# EAGLE board SHIELD 003 (EAGLE 9.4.1)

Size 109.2 x 171.12 mm. Coordinates in mm from the lower left corner, seen from the top.
Outline: 0,0 109.2,0 109.2,171.12 0,171.12 0,0
Copper layers (1*16): Top 0.035mm / dielectric 1.5mm / Bottom 0.035mm
Design rules "default": minimum track width 6mil, minimum drill 0.35mm, track to track 6mil, track to pad 6mil, pad to pad 6mil, via to via 6mil, smd to smd 6mil, copper to edge 40mil, drill to drill 6mil, minimum pad ring 10mil, minimum via ring 8mil, stop-mask expansion 4mil, vias tented up to drill 0mil, thermal gap 10mil

## Footprints (pad centres in the part's own frame; a part is rotated, then mirrored left to right if it is on the bottom)
ARDUINO_DUE_SHIELD = drill 1.067 square: 0 63.373,51.816; 5V0_1 93.853,51.816; 8 41.529,51.816; 21 86.233,51.816; 53 96.393,11.176; GND_2 93.853,8.636; MISO 63.373,31.496; MISO2 23.384,13.196 | drill 1.067: 1 60.833,51.816; 2 58.293,51.816; 3 55.753,51.816; 4 53.213,51.816; 5 50.673,51.816; 5V0_2 96.393,51.816; 5V_2 65.913,31.496; 6 48.133,51.816; 7 45.593,51.816; 9 38.989,51.816; 10 36.449,51.816; 11 33.909,51.816; 12 31.369,51.816; 13 28.829,51.816; 14 68.453,51.816; 15 70.993,51.816; 16 73.533,51.816; 17 76.073,51.816; 18 78.613,51.816; 19 81.153,51.816; 20 83.693,51.816; 22 93.853,49.276; 23 96.393,49.276; 24 93.853,46.736; 25 96.393,46.736; 26 93.853,44.196; 27 96.393,44.196; 28 93.853,41.656; 29 96.393,41.656; 30 93.853,39.116; 31 96.393,39.116; 32 93.853,36.576; 33 96.393,36.576; 34 93.853,34.036; 35 96.393,34.036; 36 93.853,31.496; 37 96.393,31.496; 38 93.853,28.956; 39 96.393,28.956; 40 93.853,26.416; 41 96.393,26.416; 42 93.853,23.876; 43 96.393,23.876; 44 93.853,21.336; 45 96.393,21.336; 46 93.853,18.796; 47 96.393,18.796; 48 93.853,16.256; 49 96.393,16.256; 50 93.853,13.716; 51 96.393,13.716; 52 93.853,11.176; AREF 23.749,51.816; GND_3 96.393,8.636; GND_4 26.289,51.816; GND_5 65.913,26.416; GND_7 33.161,44.473; JTAG_TCK 30.621,44.473; JTAG_TMS 28.081,44.473; MASTER_RESET_JTAG 25.541,44.473; MASTER_RESET_SPI 63.373,26.416; MOSI 65.913,28.956; SCL1 18.669,51.816; SDA1 21.209,51.816; SPCK 63.373,28.956 | drill 1.016 pad 1.88: 3V3 35.433,3.556; 5V0 37.973,3.556; A1 53.213,3.556; A2 55.753,3.556; A3 58.293,3.556; A4 60.833,3.556; A5 63.373,3.556; A6 65.913,3.556; A7 68.453,3.556; A9 76.073,3.556; A10 78.613,3.556; A11 81.153,3.556; CANRX 88.773,3.556; CANTX 91.313,3.556; DAC0 83.693,3.556; DAC1 86.233,3.556; GND 40.513,3.556; GND_1 43.053,3.556; IOREF 30.346,3.543; RESET 32.893,3.555; VIN 45.593,3.556 | drill 0.6 pad 1.016 square: 3V3_JTAG 23.689,36.964 | drill 1.067 octagon: 5V_ICSP1 25.924,13.196; GND_ICSP1 25.924,18.276; MOSI2 25.924,15.736; RESET2 23.384,18.276; SCK2 23.384,15.736 | drill 1.016 pad 1.88 square: A0 50.673,3.556; A8 73.533,3.556; NC_2 27.806,3.543 | drill 0.6 pad 1.143: GND_8 23.689,38.234; GND_9 23.689,40.774; GND_10 23.689,42.044; JTAG_RESET 22.419,42.044; JTAG_TCK_2 22.419,38.234; JTAG_TDI 22.419,40.774; JTAG_TDO 22.419,39.504; JTAG_TMS_2 22.419,36.964; NC_5 23.689,39.504 | hole 3.2: 15.113,51.816; 90.043,51.816; 96.393,3.556; 96.418,3.505; 15.138,51.765; 90.068,51.765; 13.868,3.505; 65.938,36.525; 65.938,8.585
C050-025X075 = drill 0.813 octagon: 1 -2.54,0; 2 2.54,0
E2-4 = drill 0.813 pad 1.422: + -1.016,0 | drill 0.813 pad 1.422 octagon: - 1.016,0
DCJACK_2MM_PTH = drill 2.8: GND 0,7.35; GNDBREAK 4.8,10.75 | drill 3.2: PWR 0,13.6
IC_DRV8825_STEPPER_MOTOR_DRIVER_CARRIER = drill 1.1 square: 1 -6.35,8.89 | drill 1.1: 2 -6.35,6.35; 3 -6.35,3.81; 4 -6.35,1.27; 5 -6.35,-1.27; 6 -6.35,-3.81; 7 -6.35,-6.35; 8 -6.35,-8.89; 9 6.35,-8.89; 10 6.35,-6.35; 11 6.35,-3.81; 12 6.35,-1.27; 13 6.35,1.27; 14 6.35,3.81; 15 6.35,6.35; 16 6.35,8.89
EVE-WRHJR012B = drill 1: A 2.55,-7.5; B 0,-7.5; B1 -2.5,-7.5; COM -2.5,7; S 2.5,7 | drill 1.8 square: M1 -5.5,0; M2 5.5,0
TO220H = drill 1.118 long: 1 -2.54,-10.16; 2 0,-10.16; 3 2.54,-10.16 | hole 3.302: 0,4.826
ARDUINO-NANO-3.0 = drill 1 square: J1.1 17.78,7.62 | drill 1: J1.2 15.24,7.62; J1.3 12.7,7.62; J1.4 10.16,7.62; J1.5 7.62,7.62; J1.6 5.08,7.62; J1.7 2.54,7.62; J1.8 0,7.62; J1.9 -2.54,7.62; J1.10 -5.08,7.62; J1.11 -7.62,7.62; J1.12 -10.16,7.62; J1.13 -12.7,7.62; J1.14 -15.24,7.62; J1.15 -17.78,7.62; J2.1 17.78,-7.62; J2.2 15.24,-7.62; J2.3 12.7,-7.62; J2.4 10.16,-7.62; J2.5 7.62,-7.62; J2.6 5.08,-7.62; J2.7 2.54,-7.62; J2.8 0,-7.62; J2.9 -2.54,-7.62; J2.10 -5.08,-7.62; J2.11 -7.62,-7.62; J2.12 -10.16,-7.62; J2.13 -12.7,-7.62; J2.14 -15.24,-7.62; J2.15 -17.78,-7.62 | hole 1.651: -20.32,7.62; -20.32,-7.62; 20.32,-7.62; 20.32,7.62
DIL04 = drill 0.813 offset: 1 -1.27,-3.81; 2 1.27,-3.81; 3 1.27,3.81; 4 -1.27,3.81
0207/10 = drill 0.813 octagon: 1 -5.08,0; 2 5.08,0
L02P = drill 1.016 long: 1 1.25,-6.25; 2 -1.25,-6.25
TO92-EBC-OVAL = drill 0.813 long: B 0,-1.27; C 2.54,-1.27; E -2.54,-1.27
3.5INCH = drill 1.1: 3-5V 21.59,-40.64; 3V3 19.05,-40.64; CARD-CS -21.59,-40.64; CARD-DET -24.13,-40.64; CLK 16.51,-40.64; CS 8.89,-40.64; D/C 6.35,-40.64; GND3 -11.43,-40.64; IM0 -19.05,-40.64; IM1 -16.51,-40.64; IM2 -13.97,-40.64; LIGHT 1.27,-40.64; MISO 13.97,-40.64; MOSI 11.43,-40.64; RST 3.81,-40.64; X+ -3.81,-40.64; X- -8.89,-40.64; Y+ -1.27,-40.64; Y- -6.35,-40.64 | drill 1.1 square: GND 24.13,-40.64 | hole 4: -30.48,50.8; 30.48,50.8; -30.48,-40.64; 30.48,-40.64
DC-DC-STEP-DOWN-LM2596 = drill 1.5 pad 2.5 square: IN+ -19.812,8.636; IN- -19.812,-8.636; OUT+ 19.812,8.636; OUT- 19.812,-8.636 | hole 3: -14.478,7.62; 15.24,-7.62
DFPLAYER-MINI-MODULE = drill 1 square: 1 -8.89,-8.89 | drill 1: 2 -6.35,-8.89; 3 -3.81,-8.89; 4 -1.27,-8.89; 5 1.27,-8.89; 6 3.81,-8.89; 7 6.35,-8.89; 8 8.89,-8.89; 9 8.89,8.89; 10 6.35,8.89; 11 3.81,8.89; 12 1.27,8.89; 13 -1.27,8.89; 14 -3.81,8.89; 15 -6.35,8.89; 16 -8.89,8.89
GPS-RECEIVER-NEO6M = drill 1 square: 1 -15.875,5.08 | drill 1: 2 -15.875,2.54; 3 -15.875,0; 4 -15.875,-2.54; 5 -15.875,-5.08 | hole 3: -14.986,9.017; -14.986,-9.017; 14.986,-9.017; 14.986,9.017 | hole 3.5: 14.351,-2.54
JOYSTICK-2AXIS-BUTTON = drill 1 square: 1 -15.24,5.08 | drill 1: 2 -15.24,2.54; 3 -15.24,0; 4 -15.24,-2.54; 5 -15.24,-5.08 | hole 3: -12.065,10.16; -12.065,-10.16; 13.97,-10.16; 13.97,10.16
RTC-DS3231-AT24C32 = drill 1 square: J1.1 -17.78,6.35; J2.1 17.78,3.81 | drill 1: J1.2 -17.78,3.81; J1.3 -17.78,1.27; J1.4 -17.78,-1.27; J1.5 -17.78,-3.81; J1.6 -17.78,-6.35; J2.2 17.78,1.27; J2.3 17.78,-1.27; J2.4 17.78,-3.81 | hole 2.2: -11.43,-9.525; -11.43,9.525; 15.24,9.525
TEMP-HUM-SENSOR-DHT22 = drill 0.8 square: 1 -3.81,0 | drill 0.8: 2 -1.27,0; 3 1.27,0; 4 3.81,0
WIRELESS-BLUETOOTH-HC-05 = drill 1 square: 1 -6.35,-17.145 | drill 1: 2 -3.81,-17.145; 3 -1.27,-17.145; 4 1.27,-17.145; 5 3.81,-17.145; 6 6.35,-17.145
CARD-SD-ADAPTER = drill 1 square: 1 -21.59,8.89 | drill 1: 2 -19.05,8.89; 3 -21.59,6.35; 4 -19.05,6.35; 5 -21.59,3.81; 6 -19.05,3.81; 7 -21.59,1.27; 8 -19.05,1.27; 9 -21.59,-1.27; 10 -19.05,-1.27; 11 -21.59,-3.81; 12 -19.05,-3.81; 13 -21.59,-6.35; 14 -19.05,-6.35; 15 -21.59,-8.89; 16 -19.05,-8.89 | hole 2.5: -20.32,12.5; -20.32,-12.5

## Placement (x,y rotation side)
ARDUINO_DUE1  [ARDUINO_DUE_SHIELD]  25.4,67.31 90 bottom
C1  10uF  [C050-025X075]  92.71,27.94 0 top
C2  100nF  [C050-025X075]  12.7,66.04 0 top
C3  [C050-025X075]  12.7,80.01 180 top
C4  [C050-025X075]  12.7,91.44 180 top
C5  100uF  [E2-4]  99.06,116.84 180 top
C6  100uF  [E2-4]  99.06,76.2 180 top
C7  100uF  [E2-4]  99.06,96.52 180 top
CN1  [DCJACK_2MM_PTH]  100.33,-1.27 0 top
DEC  DRV8825_STEPPER_MOTOR_DRIVER_CARRIER  [IC_DRV8825_STEPPER_MOTOR_DRIVER_CARRIER]  92.71,106.68 270 top
EN1  EVE-WRHJR012B  [EVE-WRHJR012B]  29.21,16.51 0 top
FOCUS  DRV8825_STEPPER_MOTOR_DRIVER_CARRIER  [IC_DRV8825_STEPPER_MOTOR_DRIVER_CARRIER]  92.71,86.36 270 top
IC1  7805T  [TO220H]  90.17,55.88 90 top
M1  ARDUINO-NANO-3.0  [ARDUINO-NANO-3.0]  53.34,21.59 90 bottom
OK1  PC817  [DIL04]  25.4,29.21 270 top
OK2  PC817  [DIL04]  25.4,35.56 270 top
OK3  PC817  [DIL04]  25.4,41.91 270 top
OK4  PC817  [DIL04]  25.4,48.26 270 top
OK5  PC817  [DIL04]  25.4,54.61 270 top
R1  220  [0207/10]  12.7,62.23 180 top
R2  6.8  [0207/10]  12.7,59.69 0 top
R3  10K  [0207/10]  12.7,102.87 0 top
R4  330  [0207/10]  12.7,77.47 180 top
R5  330  [0207/10]  12.7,87.63 180 top
R6  100  [0207/10]  11.43,38.1 0 top
R7  100  [0207/10]  11.43,43.18 0 top
R8  100  [0207/10]  11.43,40.64 0 top
R9  100  [0207/10]  11.43,45.72 0 top
R10  100  [0207/10]  11.43,48.26 180 bottom
R11  100k  [0207/10]  73.66,21.59 90 top
R12  47k  [0207/10]  76.2,21.59 270 top
R13  100k  [0207/10]  78.74,21.59 90 top
R14  47k  [0207/10]  81.28,21.59 270 top
R15  10k  [0207/10]  38.1,130.81 90 top
R16  26k  [0207/10]  40.64,130.81 270 top
R17  47k  [0207/10]  86.36,21.59 270 top
R18  100k  [0207/10]  83.82,21.59 90 top
R19  100  [0207/10]  38.1,30.48 180 top
R20  100  [0207/10]  38.1,33.02 0 top
R21  100  [0207/10]  38.1,35.56 180 top
R22  100  [0207/10]  38.1,40.64 180 top
R23  100  [0207/10]  38.1,38.1 180 top
RA  DRV8825_STEPPER_MOTOR_DRIVER_CARRIER  [IC_DRV8825_STEPPER_MOTOR_DRIVER_CARRIER]  92.71,127 270 top
SV1  [L02P]  0,69.85 90 top
SV2  [L02P]  0,83.82 90 top
SV3  [L02P]  0,55.88 90 top
SV4  [L02P]  72.39,104.14 0 top
T1  2N2222  [TO92-EBC-OVAL]  12.7,72.39 180 top
T2  2N2222  [TO92-EBC-OVAL]  12.7,97.79 0 top
T3  2N2222  [TO92-EBC-OVAL]  12.7,50.8 180 top
U1  3.5INCH  [3.5INCH]  53.34,116.84 0 top
U$1  DC-DC-STEP-DOWN-LM2596  [DC-DC-STEP-DOWN-LM2596]  97.79,50.8 90 bottom
U$2  DFPLAYER-MINI-MODULE  [DFPLAYER-MINI-MODULE]  53.34,105.41 90 top
U$3  GPS-RECEIVER-NEO6M  [GPS-RECEIVER-NEO6M]  92.84,152.65 90 top
U$4  JOYSTICK-2AXIS-BUTTON  [JOYSTICK-2AXIS-BUTTON]  78.74,22.86 90 top
U$5  RTC-DS3231-AT24C32  [RTC-DS3231-AT24C32]  15.24,128.27 90 top
U$6  TEMP-HUM-SENSOR-DHT22  [TEMP-HUM-SENSOR-DHT22]  2.54,99.06 270 top
U$7  WIRELESS-BLUETOOTH-HC-05  [WIRELESS-BLUETOOTH-HC-05]  21.59,156.21 270 top
U$8  CARD-SD-ADAPTER  [CARD-SD-ADAPTER]  82.55,58.42 180 bottom

## Library data of the parts
ARDUINO_DUE1 = arduino_due_shield
C1-C4 CN1 T1-T3 = adafruit
C5-C7 = BeagleBone_Blue_R3
DEC FOCUS RA = DRV8825_STEPPER_MOTOR_DRIVER_CARRIER; AVAILABILITY: Unavailable; DESCRIPTION: Stepper, Bipolar 8.2 ~ 45VDC Supply 1.5A 8.2 ~ 45V Load; MF: Pololu; MP: DRV8825 STEPPER MOTOR DRIVER CARRIER; PACKAGE: None; PRICE: None
EN1 = Encoders; CREATED_BY: PCBLayout.com; DIGIKEY_PARTNO: P15917-ND; MANUFACTURER: Panasonic Electronic Components; MPN: EVE-WRHJR012B
IC1 = linear
M1 U$1-U$8 = diy-modules
OK1-OK5 = optocoupler-3-jcn
R1-R23 = eagle-ltspice; SPICEMODEL: NONE; SPICEPREFIX: R
SV1-SV4 = con-amp-mt; OC_FARNELL: unknown; OC_NEWARK: unknown
U1 = 3.5inch display adafruit-NO8BIT; AVAILABILITY: Unavailable; DESCRIPTION: Stepper, Bipolar 8.2 ~ 45VDC Supply 1.5A 8.2 ~ 45V Load; MF: Pololu; MP: DRV8825 STEPPER MOTOR DRIVER CARRIER; PACKAGE: None; PRICE: None

## Nets
3-5V: U1.3-5V
3V3: ARDUINO_DUE1.3V3 DEC.5 DEC.6 DEC.10 FOCUS.5 FOCUS.6 FOCUS.10 M1.J2.14 OK1.3 OK2.3 OK3.3 OK4.3 OK5.3 R3.1 RA.5 RA.6 RA.10 U$6.1 U$8.3
5V: R2.2 SV1.2 SV2.2 U$1.OUT+ U$2.1 U$5.J1.5 U$7.5 U$8.5
5V_A: ARDUINO_DUE1.5V0 ARDUINO_DUE1.5V0_1 ARDUINO_DUE1.5V0_2 M1.J2.4 U$3.1 U$4.2
9V: ARDUINO_DUE1.VIN C2.1 IC1.3 M1.J2.1
12V: C1.1 C5.+ C6.+ C7.+ CN1.PWR DEC.16 FOCUS.16 IC1.1 R16.2 RA.16 U$1.IN+
DAC1: ARDUINO_DUE1.DAC1 R1.1
DEC+: M1.J1.9 R8.1
DEC-: M1.J1.6 R9.1
DEC-A1: DEC.12
DEC-A2: DEC.11
DEC-B1: DEC.13
DEC-B2: DEC.14
DEC_M0: ARDUINO_DUE1.10 DEC.2
DEC_M1: ARDUINO_DUE1.9 DEC.3
DEC_M2: ARDUINO_DUE1.8 DEC.4
FOCUS-A1: FOCUS.12
FOCUS-A2: FOCUS.11
FOCUS-B1: FOCUS.13
FOCUS-B2: FOCUS.14
FOCUS_M0: FOCUS.2
FOCUS_M1: FOCUS.3
FOCUS_M2: FOCUS.4
G-SENSE: M1.J1.10 R10.1
GND: ARDUINO_DUE1.GND ARDUINO_DUE1.GND_1 ARDUINO_DUE1.GND_2 ARDUINO_DUE1.GND_3 ARDUINO_DUE1.GND_4 ARDUINO_DUE1.GND_5 ARDUINO_DUE1.GND_7 ARDUINO_DUE1.GND_8 ARDUINO_DUE1.GND_9 ARDUINO_DUE1.GND_10 C1.2 C2.2 C3.2 C4.2 C5.- C6.- C7.- CN1.GND DEC.9 DEC.15 FOCUS.9 FOCUS.15 IC1.2 M1.J1.4 M1.J2.2 OK1.2 OK2.2 OK3.2 OK4.2 OK5.2 R11.1 R13.1 R15.1 R18.1 RA.9 RA.15 T1.E T2.E T3.E U1.GND U$1.IN- U$1.OUT- U$2.7 U$2.10 U$3.2 U$4.1 U$5.J1.6 U$5.J2.4 U$6.4 U$7.4 U$8.1 U$8.15
GND2: U1.GND3
GNDBREAK: CN1.GNDBREAK
N$1: R1.2 T3.B
N$2: R2.1 SV3.1
N$3: SV1.1 T1.C
N$4: R4.2 T1.B
N$5: SV3.2 T3.C
N$6: R5.2 T2.B
N$7: SV2.1 T2.C
N$9: R17.2 U$4.5
N$19: ARDUINO_DUE1.A11
N$21: ARDUINO_DUE1.2
N$22: ARDUINO_DUE1.CANRX
N$23: ARDUINO_DUE1.CANTX
N$24: ARDUINO_DUE1.1
N$25: ARDUINO_DUE1.0
N$30: OK5.4 R23.2
N$31: OK4.4 R22.2
N$32: OK3.4 R21.2
N$33: OK2.4 R20.2
N$34: OK1.4 R19.2
N$35: OK5.1 R10.2
N$36: OK4.1 R9.2
N$37: OK3.1 R8.2
N$38: OK2.1 R7.2
N$39: OK1.1 R6.2
N$40: R12.2 U$4.3
N$41: M1.J1.11
N$42: R14.2 U$4.4
N$45: ARDUINO_DUE1.20
P_3: ARDUINO_DUE1.3
P_4: ARDUINO_DUE1.4 RA.7
P_5: ARDUINO_DUE1.5 RA.8
P_6: ARDUINO_DUE1.6 DEC.7
P_7: ARDUINO_DUE1.7 DEC.8
P_14: ARDUINO_DUE1.14 U$7.2
P_15: ARDUINO_DUE1.15 U$7.3
P_16: ARDUINO_DUE1.16 U$3.4
P_17: ARDUINO_DUE1.17 U$3.3
P_18: ARDUINO_DUE1.18 U$2.2
P_19: ARDUINO_DUE1.19 U$2.3
P_21: ARDUINO_DUE1.21 U$8.7
P_22: ARDUINO_DUE1.22
P_23: ARDUINO_DUE1.23
P_24: ARDUINO_DUE1.24
P_25: ARDUINO_DUE1.25
P_26: ARDUINO_DUE1.26
P_27: ARDUINO_DUE1.27 FOCUS.8
P_28: ARDUINO_DUE1.28
P_29: ARDUINO_DUE1.29 FOCUS.7
P_30: ARDUINO_DUE1.30
P_31: ARDUINO_DUE1.31
P_32: ARDUINO_DUE1.32
P_33: ARDUINO_DUE1.33
P_34: ARDUINO_DUE1.34
P_35: ARDUINO_DUE1.35
P_36: ARDUINO_DUE1.36
P_37: ARDUINO_DUE1.37
P_38: ARDUINO_DUE1.38
P_39: ARDUINO_DUE1.39
P_40: ARDUINO_DUE1.40
P_41: ARDUINO_DUE1.41
P_42: ARDUINO_DUE1.42
P_43: ARDUINO_DUE1.43 R3.2 U$6.2
P_44: ARDUINO_DUE1.44
P_45: ARDUINO_DUE1.45
P_46: ARDUINO_DUE1.46
P_47: ARDUINO_DUE1.47 RA.1
P_48: ARDUINO_DUE1.48
P_49: ARDUINO_DUE1.49 DEC.1
P_50: ARDUINO_DUE1.50
P_51: ARDUINO_DUE1.51 FOCUS.1
P_52: ARDUINO_DUE1.52
P_53: ARDUINO_DUE1.53
P_54: ARDUINO_DUE1.DAC0
P_62: U$8.13
P_63: U$8.9
P_64: U$8.11
P_A0: ARDUINO_DUE1.A0 R13.2 R14.1
P_A1: ARDUINO_DUE1.A1 R11.2 R12.1
P_A2: ARDUINO_DUE1.A2 C3.1 R4.1
P_A3: ARDUINO_DUE1.A3 C4.1 R5.1
P_A4: ARDUINO_DUE1.A4 U$5.J1.4
P_A5: ARDUINO_DUE1.A5 U$5.J1.3
P_A6: ARDUINO_DUE1.A6
P_A7: ARDUINO_DUE1.A7 R15.2 R16.1
P_A8: ARDUINO_DUE1.A8
P_A9: ARDUINO_DUE1.A9 R17.1 R18.2
P_A10: ARDUINO_DUE1.A10
PPS: U$3.5
PULSE_LED: M1.J1.12
RA+: M1.J1.7 R6.1
RA-: M1.J1.8 R7.1
RA-A1: RA.12
RA-A2: RA.11
RA-B1: RA.13
RA-B2: RA.14
RA_M0: ARDUINO_DUE1.11 RA.2
RA_M1: ARDUINO_DUE1.12 RA.3
RA_M2: ARDUINO_DUE1.13 RA.4
RESET: ARDUINO_DUE1.RESET
SPK1: SV4.2 U$2.8
SPK2: SV4.1 U$2.6
VCC.2: U$5.J2.3

## Tracks (layer width: path | path; a pad name or v marks a point on that pad's centre or on a via)
3V3  (18 unrouted)
5V  (7 unrouted)
5V_A  (5 unrouted)
9V  (3 unrouted)
12V  (10 unrouted)
DAC1  (1 unrouted)
DEC+  (1 unrouted)
DEC-  (1 unrouted)
DEC_M0  (1 unrouted)
DEC_M1  (1 unrouted)
DEC_M2  (1 unrouted)
G-SENSE  (1 unrouted)
GND  (51 unrouted)
N$1  (1 unrouted)
N$2  (1 unrouted)
N$3  (1 unrouted)
N$4  (1 unrouted)
N$5  (1 unrouted)
N$6  (1 unrouted)
N$7  (1 unrouted)
N$9  (1 unrouted)
N$30  (1 unrouted)
N$31  (1 unrouted)
N$32  (1 unrouted)
N$33  (1 unrouted)
N$34  (1 unrouted)
N$35  (1 unrouted)
N$36  (1 unrouted)
N$37  (1 unrouted)
N$38  (1 unrouted)
N$39  (1 unrouted)
N$40  (1 unrouted)
N$42  (1 unrouted)
P_4  (1 unrouted)
P_5  (1 unrouted)
P_6  (1 unrouted)
P_7  (1 unrouted)
P_14  (1 unrouted)
P_15  (1 unrouted)
P_16  (1 unrouted)
P_17  (1 unrouted)
P_18  (1 unrouted)
P_19  (1 unrouted)
P_21  (1 unrouted)
P_27  (1 unrouted)
P_29  (1 unrouted)
P_43  (2 unrouted)
P_47  (1 unrouted)
P_49  (1 unrouted)
P_51  (1 unrouted)
P_A0  (2 unrouted)
P_A1  (2 unrouted)
P_A2  (2 unrouted)
P_A3  (2 unrouted)
P_A4  (1 unrouted)
P_A5  (1 unrouted)
P_A7  (2 unrouted)
P_A9  (2 unrouted)
RA+  (1 unrouted)
RA-  (1 unrouted)
RA_M0  (1 unrouted)
RA_M1  (1 unrouted)
RA_M2  (1 unrouted)
SPK1  (1 unrouted)
SPK2  (1 unrouted)